# Altium PCB LPEDT_revA1_bikeit_rev_01.PcbDoc (part 3 of 3)
Units mil, origin at the board's own origin, x right, y up, seen from the top; angles counter-clockwise.
Board outline 6000 x 4000 mil, 2 copper layers (Top Layer, Bottom Layer); 80 components, 64 nets, 444 pads, 0 vias.
Unrouted connection lines stored in the file: 203.
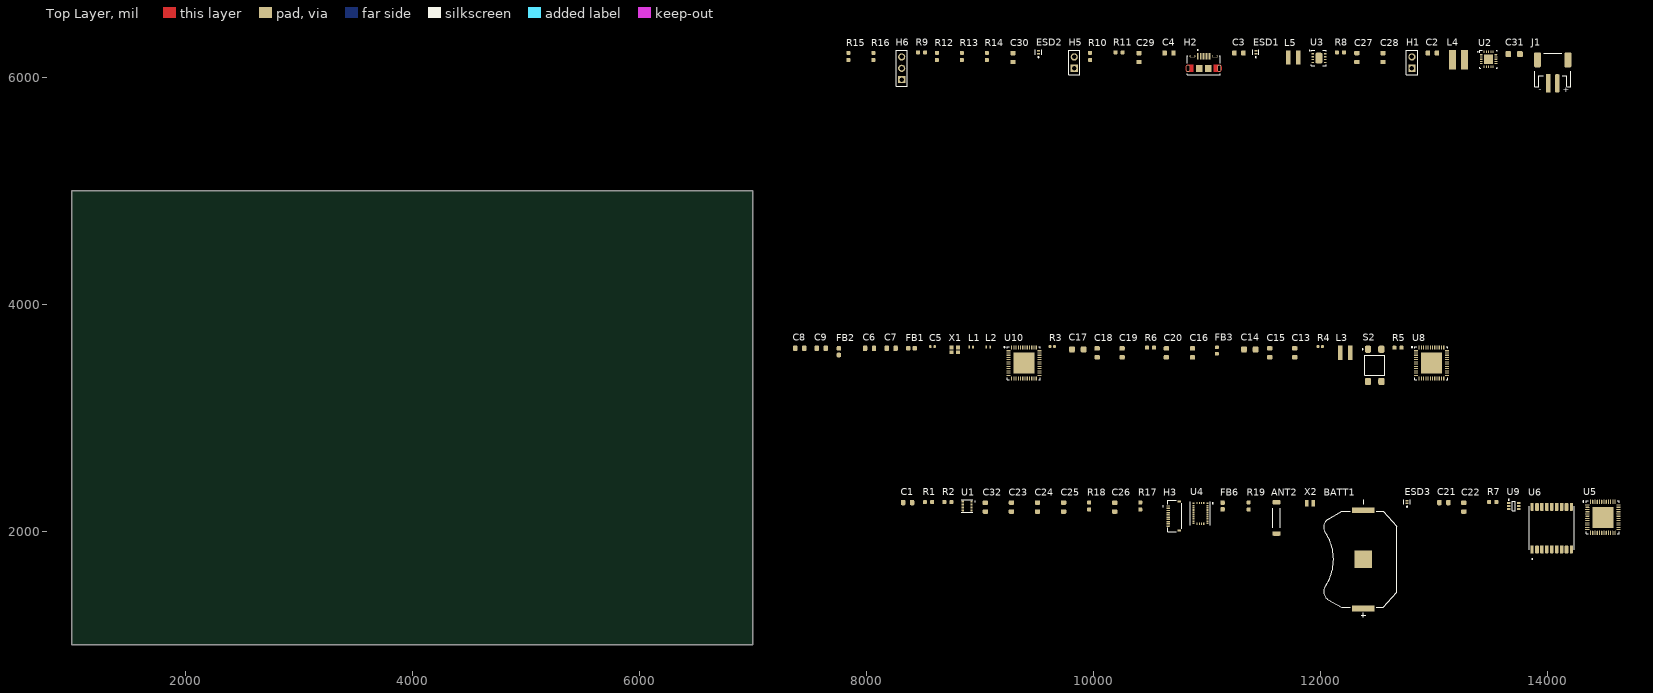
[diagram p0: Top Layer view]

## Part data (continued)
U3: library part TPS2115ADRBT, "OR Controller Source Selector Switch N-Channel 2:1 8-SON (3x3)", Case/Package=SON, Current - Output 2=1.25A, Manufacturer="Texas Instruments", Max Input Voltage=5.5V, Max Operating Temperature=85°C, Max Power Dissipation=2.5W, Max Supply Current=90uA, Min Input Voltage=2.8V, Min Operating Temperature=-40°C, Nominal Supply Current=55uA, On-State Resistance=110mR, Package Quantity=250, Supplier Part Number 1=296-39358-1-ND, Category="Power Management ICs", ComponentLink1Description=https://datasheet.ciiva.com/15109/getdatasheetpartid-445171-15109276.pdf?src-supplier=Verical, ComponentLink1URL=https://datasheet.ciiva.com/15109/getdatasheetpartid-445171-15109276.pdf?src-supplier=Verical, ComponentLink2Description=https://datasheet.ciiva.com/1961/tps2115a-1961013.pdf?src-supplier=Digi-Key, ComponentLink2URL=https://datasheet.ciiva.com/1961/tps2115a-1961013.pdf?src-supplier=Digi-Key, ComponentLink3Description=https://datasheet.ciiva.com/3232/tps2115a-3232473.pdf?src-supplier=Avnet, ComponentLink3URL=https://datasheet.ciiva.com/3232/tps2115a-3232473.pdf?src-supplier=Avnet, ComponentLink4Description=https://datasheet.ciiva.com/25905/sbvs044f-25905737.pdf?src-supplier=Avnet+Europe, ComponentLink4URL=https://datasheet.ciiva.com/25905/sbvs044f-25905737.pdf?src-supplier=Avnet+Europe, ComponentLink5Description=https://datasheet.ciiva.com/3232/tps2115a-3232538.pdf?src-supplier=Avnet, ComponentLink5URL=https://datasheet.ciiva.com/3232/tps2115a-3232538.pdf?src-supplier=Avnet, ComponentLink6Description=https://datasheet.ciiva.com/28652/1862467-28652426.pdf?src-supplier=Element14, ComponentLink6URL=https://datasheet.ciiva.com/28652/1862467-28652426.pdf?src-supplier=Element14, Lead Free="Lead Free", Manufacturer Part Number=TPS2115ADRBT, Max Output Current=1.25A, Number of Inputs=2, Number of Outputs=1, Number of Pins=8, Number of Switches=1, Operating Supply Current=55uA, Operating Supply Voltage=5.5V, Output Current=1.25A, Packaging="Tape and Reel", Pricing 1="1=2.44000, 10=2.18800, 25=2.06440, 100=1.65150 (USD)", Radiation Hardening=No, REACH SVHC="No SVHC", RoHS=Yes, RoHS Compliant=Yes, Series=-, Stock 1=1983, Supplier 1=Digi-Key, Supply Current=55uA, Turn-Off Delay Time=5ms, Turn-On Delay Time=1ms, Weight=0.000847oz
U4: "IMU ACCEL/GYRO/MAG I2C 28LGA / CMP-2000-05075-4", Case/Package=LGA, Max Operating Temperature=85°C, Min Operating Temperature=-40°C, Lead Free="Lead Free", Mount="Surface Mount", Output Type=I2C, Packaging="Tape and Reel", Sensor Type=Accelerometer
U5 U8 U10: "BLUE GECKO QFN48 2.4 GHZ 512KB 6", Manufacturer="Silicon Labs", Supplier Part Number 1=336-4109-ND, Category="RF Receivers, Transceivers", ComponentLink1Description=http://www.farnell.com/datasheets/2813683.pdf?src-supplier=Farnell, ComponentLink1URL=http://www.farnell.com/datasheets/2813683.pdf?src-supplier=Farnell, Manufacturer Part Number=EFR32BG13P732F512GM48-C, Pricing 1="1=7.61000, 10=6.79200, 25=6.11320, 80=5.56988, 230=5.02643, 440=4.51023, 945=3.80380 (USD)", RoHS=No, Supplier 1=Digi-Key
U6: "MAX-M8 RF Receiver BeiDou, Galileo, GLONASS, GNSS, GPS 1.575GHz -167dBm", Package="SMD-18 u-blox", Supplier Part Number 1=672-MAX-M8Q-0TR-ND, Availability=Warning, Check_prices=https://www.snapeda.com/parts/MAX-M8Q-0/U-Blox%20America%20Inc./view-part/563405/?ref=eda, MF="U-Blox America", MP=MAX-M8Q-0, Price=None, Purchase-URL=https://pricing.snapeda.com/search/part/MAX-M8Q-0/?ref=eda, SnapEDA_Link=https://www.snapeda.com/parts/MAX-M8Q-0/U-Blox%20America%20Inc./view-part/563405/?ref=snap, Supplier 1=Digi-Key
U9: library part TPS22919DCKR, "5.5-V, 1.5-A, 90-mΩ load switch with adj. output discharge 6-SC70 -40 to 105", Manufacturer="Texas Instruments", Supplier Part Number 1=296-TPS22919DCKRCT-ND, Manufacturer Part Number=TPS22919DCKR, Pricing 1="1=0.39000, 10=0.29100, 25=0.26240, 100=0.14310, 250=0.13832, 500=0.12402, 1000=0.09540 (USD)", RoHS=Yes, RoHS Compliant=Yes, Stock 1=68518, Supplier 1=Digi-Key
X1: library part CX2016DB38400D0FLJCC, "CRYSTAL 38.4000MHZ 8PF SMD", Case/Package=SMD/SMT, ESR (Equivalent Series Resistance)=60R, Frequency=38.4MHz, Frequency Stability=15ppm, Frequency Tolerance=10ppm, Load Capacitance=8pF, Manufacturer="Kyocera AVX", Max Operating Temperature=85°C, Min Operating Temperature=-30°C, Package Quantity=3000, Supplier Part Number 1=1253-1119-1-ND, Category=Crystals, ComponentLink1Description=https://datasheet.ciiva.com/26992/cx2016db-cs-e-26992341.pdf?src-supplier=Mouser, ComponentLink1URL=https://datasheet.ciiva.com/26992/cx2016db-cs-e-26992341.pdf?src-supplier=Mouser, ComponentLink2Description=https://datasheet.ciiva.com/29631/cx2016db-wl-e-29631639.pdf?src-supplier=Digi-Key, ComponentLink2URL=https://datasheet.ciiva.com/29631/cx2016db-wl-e-29631639.pdf?src-supplier=Digi-Key, ComponentLink3Description=https://datasheet.ciiva.com/29631/cx2016db-wl-e-29631640.pdf?src-supplier=Digi-Key, ComponentLink3URL=https://datasheet.ciiva.com/29631/cx2016db-wl-e-29631640.pdf?src-supplier=Digi-Key, ComponentLink4Description=https://datasheet.ciiva.com/29631/cx2016db-wl-e-29631641.pdf?src-supplier=Digi-Key, ComponentLink4URL=https://datasheet.ciiva.com/29631/cx2016db-wl-e-29631641.pdf?src-supplier=Digi-Key, Height=0.018inch, Lead Pitch=1.4mm, Length=0.079inch, Manufacturer Part Number=CX2016DB38400D0FLJCC, Mount="Surface Mount", Packaging="Tape and Reel", Pricing 1="1=0.65000, 10=0.57500, 50=0.53760, 100=0.47500, 500=0.45000, 1000=0.37500 (USD)", RoHS=Yes, Stock 1=63853, Supplier 1=Digi-Key, Termination=SMD/SMT, Tolerance=10ppm, Width=1.6mm
X2: library part CM8V-T1A-32.768KHZ-12.5PF-20PPM-TB-QA, "32.768kHz ±20ppm Crystal 12.5pF 70 kOhms 2-SMD, No Lead", Manufacturer="Micro Crystal", Supplier Part Number 1=2195-CM8V-T1A-32.768KHZ-12.5PF-20PPM-TB-QACT-ND, Manufacturer Part Number=CM8V-T1A-32.768KHZ-12.5PF-20PPM-TB-QA, Pricing 1="1=0.77000, 10=0.63800, 50=0.57400, 100=0.51030, 500=0.48478 (USD)", RoHS=No, Stock 1=2694, Supplier 1=Digi-Key

## Nets (pads, with @x,y where several pads share a name; then routed paths per layer and width w, separated by ;. In a path a pad name is that pad's centre, name@x,y a point inside that pad or via, vN(x,y) a via of type N, cw(c..) or ccw(c..) an arc to the next point about the centre after c; other vN are vias at no path point)
+3V3: C1.1 C21.1 C24.1 C26.1 C29.1 FB6.1 H3.7 L5.2 R1.2 R2.1 R4.1 R17.1 R18.1 R19.2 U1.2 U1.6 U1.8 U2.14 U4.3 U4.28 U9.1
+3V3_GPS: C22.1 R7.2 U6.7 U6.8 U9.6
+3V3_MCU: C14.1 C15.1 C20.1 FB3.1 R4.2 U8.39 U8.42
+3V3_VDCDC_OUT: C13.1 C16.1 FB1.1 L3.2 R3.2 U8.40
+3V7_BATT: C31.1 J1.2 U2.18
+3V_GPS: BATT1.2 ESD3.1 U6.6
+5V_IN: C4.1 ESD2.1 H2.1 U3.6
+V_PMIC_IN: C2.1 L4.1 R8.2 U2.2 U3.7
+V_SOLAR_IN: C3.1 ESD1.1 H1.2 U3.8
AVDD: C17.1 C18.1 R6.2 U8.34
D0: H5.1 U3.2
D1: H6.2 U3.3
DISP: C23.1 H3.5 U5.20
DISP_VDDA: C25.1 FB6.2 H3.6
EXTCOMIN: H3.4 U5.46
EXTINT_GPS: U5.33 U6.5
EXTINT_IMU: U4.14 U5.22
EXTMODE: H3.8 U5.19
GND: BATT1.1 C1.2 C2.2 C3.2 C4.2 C5.2 C6.2 C7.2 C8.2 C9.2 C13.2 C14.2 C15.2 C16.2 C17.2 C18.2 C19.2 C20.2 C21.2 C22.2 C23.2 C24.2 C25.2 C26.2 C27.2 C28.2 C29.2 C30.2 C31.2 C32.2 ESD1.2 ESD2.2 ESD3.2 H1.1 H2.5 H2.S1 H2.S2 H2.S3 H2.S4 H2.S5 H2.S6 H3.9 H3.10 H3.S1 H3.S2 H5.2 H6.3 J1.1 R9.1 R11.2 R14.2 R16.2 S2.3 S2.4 U1.1 U1.5 U1.7 U2.1 U2.5 U2.15 U2.21 U3.5 U4.2 U4.5 U4.6 U4.25 U6.1 U6.10 U6.12 U8.0 U8.37 U9.2 U10.14 U10.15 U10.16 X1.2 X1.4
GPS_ON: U5.31 U9.3
HFXTAL_N: U10.10 X1.3
HFXTAL_P: U10.11 X1.1
LBUCK: L5.1 U2.16
LFXTAL_N: U5.35 X2.2
LFXTAL_P: U5.36 X2.1
n_BOOT_LOAD_PIN: R19.1 U4.4
NetANT1_1: L2.2
NetANT2_1: ANT2.1 U6.11
NetC5_1: C5.1 L1.2 L2.1
NetC19_1: C19.1 U8.41
NetC32_1: C32.1 U4.9 U4.17 U4.18
NetFB3_2: FB3.2 R6.1
NetL1_1: L1.1 U10.17
NetL3_1: L3.1 U8.38
NetL4_2: L4.2 U2.20
NetR5_1: R5.1 S2.1 S2.2
NetR7_1: R7.1 U9.5
NetR9_2: R9.2 U3.4
OK_HYST: R12.2 R13.1 U2.10
OK_PROG: R13.2 R14.1 U2.11
PAVDD: C8.1 C9.1 FB2.1 FB2.2 R3.1 U10.18
PMUX_D1: H6.1 U5.30
PMUX_STAT: R8.1 U3.1
RESET_GPS: U5.32 U6.9
RESET_IMU: U4.11 U5.21
RESETn: R5.2 U8.12
RFVDD: C6.1 C7.1 FB1.2 U10.9
SCL_BME: R2.2 U1.4 U5.28
SCL_BNO: R18.2 U4.19 U5.48
SDA_BME: R1.1 U1.3 U5.27
SDA_BNO: R17.2 U4.20 U5.47
SPI_CS: H3.3 U5.44
SPI_SCK: H3.1 U5.43
SPI_SDI: H3.2 U5.45
SWCLK: U5.1
SWDIO: U5.2
SWO: U5.3
"UART_ TXO": U5.25 U6.2
UART_RXI: U5.26 U6.3
VBAT_OV: R15.2 R16.1 U2.7
VOUT_SET: R10.2 R11.1 U2.12
VRDIV: R10.1 R12.1 R15.1 U2.8
VREF_SAMP: C30.1 U2.4
VSTOR: C27.1 C28.1 U2.3 U2.6 U2.19
pads on no net: ANT2.2 H2.2 H2.3 H2.4 J1.NC1 J1.NC2 U2. U2.9 U2.13 U2.17 U3.9 U4.1 U4.7 U4.8 U4.10 U4.12 U4.13 U4.15 U4.16 U4.21 U4.22 U4.23 U4.24 U4.26 U4.27 U5.0 U5.4 U5.5 U5.6 U5.7 U5.8 U5.9 U5.10 U5.11 U5.12 U5.13 U5.14 U5.15 U5.16 U5.17 U5.18 U5.23 U5.24 U5.29 U5.34 U5.37 U5.38 U5.39 U5.40 U5.41 U5.42 U6. U6.4 U6.13 U6.14 U6.15 U6.16 U6.17 U6.18 U8.1 U8.2 U8.3 U8.4 U8.5 U8.6 U8.7 U8.8 U8.9 U8.10 U8.11 U8.13 U8.14 U8.15 U8.16 U8.17 U8.18 U8.19 U8.20 U8.21 U8.22 U8.23 U8.24 U8.25 U8.26 U8.27 U8.28 U8.29 U8.30 U8.31 U8.32 U8.33 U8.35 U8.36 U8.43 U8.44 U8.45 U8.46 U8.47 U8.48 U9.4 U10.0 U10.1 U10.2 U10.3 U10.4 U10.5 U10.6 U10.7 U10.8 U10.12 U10.13 U10.19 U10.20 U10.21 U10.22 U10.23 U10.24 U10.25 U10.26 U10.27 U10.28 U10.29 U10.30 U10.31 U10.32 U10.33 U10.34 U10.35 U10.36 U10.37 U10.38 U10.39 U10.40 U10.41 U10.42 U10.43 U10.44 U10.45 U10.46 U10.47 U10.48

## Text inside footprints (layer, text, board x,y; h text height)
H2: Mechanical 13 "PCB END" at 10896.54,5997.32 h19.68
J1: Top Overlay "+" at 14138.24,5853.46 h86.8; Top Overlay "-" at 13923.31,5850 h86.8